# Altium PCB Mixer Placed.PCBDOC
Units mil, origin at the board's own origin, x right, y up, seen from the top; angles counter-clockwise.
Board outline 8000 x 4000 mil, 2 copper layers (Top Layer, Bottom Layer); 97 components, 56 nets, 281 pads, 0 vias.
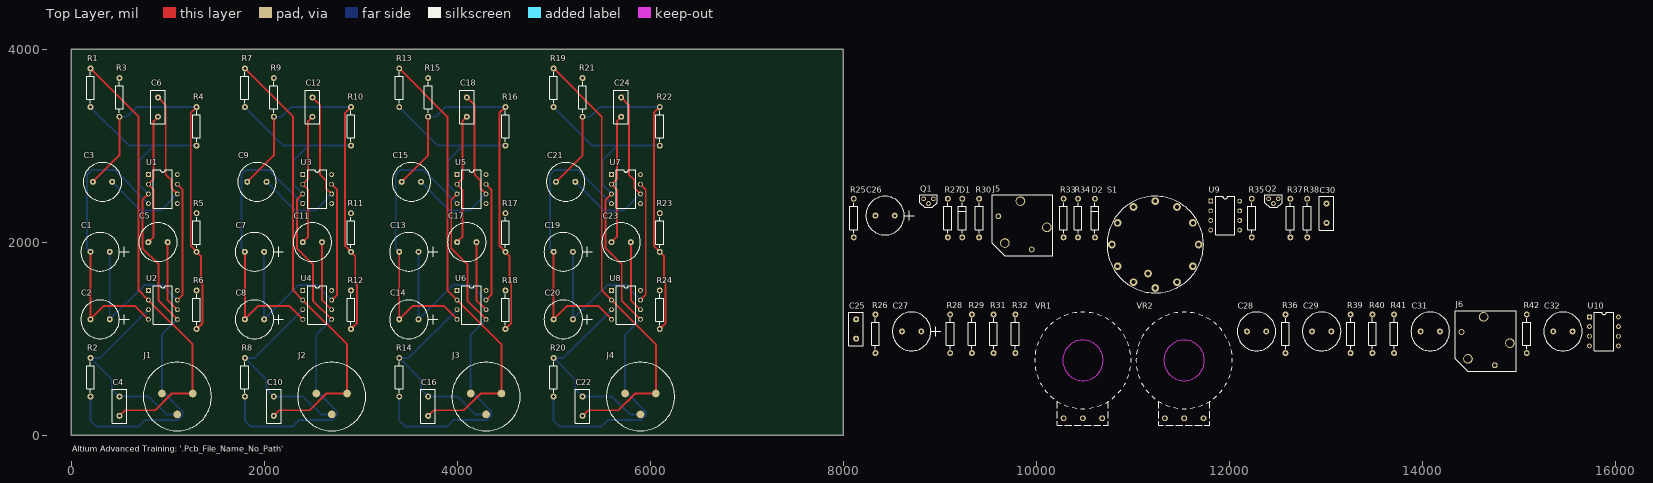
[diagram p0: Top Layer view]
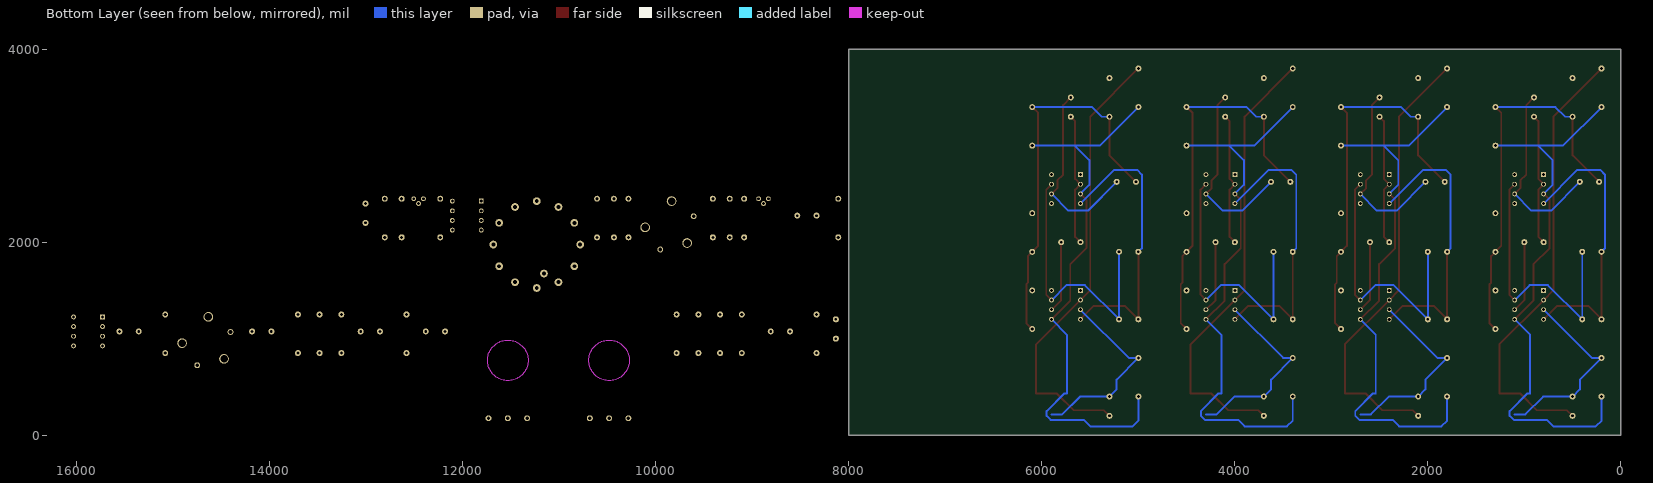
[diagram p1: Bottom Layer view, seen from below]

## Layer stack, top to bottom
Top Solder: solder mask 0.4, Solder Resist, Dk 3.5
Top Layer: signal copper 1.4
Dielectric 1: dielectric 12.6, FR-4, Dk 4.8
Bottom Layer: signal copper 1.4
Bottom Solder: solder mask 0.4, Solder Resist, Dk 3.5

## Board outline
0,0 8000,0 8000,3000 8000,4000 0,4000 0,0

## Design rules (kind name [scope] priority, off if disabled: settings)
Clearance [All] p1: gap=20 ignorepadtopadclearanceinfootprint=FALSE except(0: Arc-Hole Track-Hole SMDPad-Hole THPad-Hole Via-Hole Fill-Hole Poly-Hole Region-Hole Text-Hole)
PolygonConnect [All] p1: connectstyle=Relief reliefconductorwidth=10 reliefentries=4 polygonreliefangle="90 Angle" airgapwidth=10
RoomDefinition INP4 [InComponentClass('INP4')] p1: confinementstyle=ConfineIn formatcopy=TRUE lockcomponents=FALSE outline 0,0 1500,0 1500,4000 0,4000
RoomDefinition INP3 [InComponentClass('INP3')] p2: confinementstyle=ConfineIn formatcopy=TRUE lockcomponents=FALSE outline 1600,0 3100,0 3100,4000 1600,4000
RoomDefinition INP2 [InComponentClass('INP2')] p3: confinementstyle=ConfineIn formatcopy=TRUE lockcomponents=FALSE outline 3200,0 4700,0 4700,4000 3200,4000
RoomDefinition INP1 [InComponentClass('INP1')] p4: confinementstyle=ConfineIn formatcopy=TRUE lockcomponents=FALSE outline 4800,0 6300,0 6300,4000 4800,4000
RoomDefinition HP [InComponentClass('HP')] p5: confinementstyle=ConfineIn formatcopy=TRUE lockcomponents=FALSE outline 8060,1450 13110,1450 13110,2600 8060,2600
RoomDefinition AUX [InComponentClass('AUX')] p6: confinementstyle=ConfineIn formatcopy=TRUE lockcomponents=FALSE outline 8035,75 16085,75 16085,1400 8035,1400
RoutingVias [All] p1: holewidth=28 width=50 viastyle="Through Hole" minholewidth=28 minwidth=50 maxholewidth=28 maxwidth=50
SilkToBoardRegionClearance [All] p1 off:
SilkToSilkClearance [All] p1 off: silktosilkclearance=50
SilkToSolderMaskClearance [IsPad] p1: minsilkscreentomaskgap=100 clearancetoexposedcopper=TRUE
SolderMaskExpansion [All] p1: expansion=4 istentingtop=FALSE
SupplyNets "Schematic Supply Nets_2" [InNet('GND')] p1: voltage=0.000
SupplyNets "Schematic Supply Nets_1" [InNet('+15V')] p2: voltage=0.000
SupplyNets "Schematic Supply Nets" [InNet('-15V')] p3: voltage=0.000
Width [All] p1: maxlimit=30 minlimit=10 preferedwidth=20
27 further rules are at their usual default settings.

## Classes and differential pairs
channel class "Input channel": INP1 INP2 INP3 INP4
component class INP4: C1 C2 C3 C4 C5 C6 J1 R1 R2 R3 R4 R5 R6 U1 U2
component class INP3: C7 C8 C9 C10 C11 C12 J2 R7 R8 R9 R10 R11 R12 U3 U4
component class INP2: C13 C14 C15 C16 C17 C18 J3 R13 R14 R15 R16 R17 R18 U5 U6
component class INP1: C19 C20 C21 C22 C23 C24 J4 R19 R20 R21 R22 R23 R24 U7 U8
net class MB[1..2]: MB1 MB2
net class HEADPHONE[1..4]: HEADPHONE1 HEADPHONE2 HEADPHONE3 HEADPHONE4
component class HP: C26 C30 D1 D2 J5 Q1 Q2 R25 R27 R30 R33 R34 R35 R37 R38 S1 U9
component class AUX: C25 C27 C28 C29 C31 C32 J6 R26 R28 R29 R31 R32 R36 R39 R40 R41 R42 U10 VR1 VR2

## Components (designator, comment, footprint, x,y, rotation, side; value= is the part's Value field where it differs from the comment)
C1 "10uF" RB.2/.4 400,1900 r0 top (schematic designator C7)
C2 "10uF" RB.2/.4 400,1200 r0 top (schematic designator C8)
C3 "2.2uF" RB.2/.4-NP 425,2625 r0 top (schematic designator C6)
C4 "270pF" RAD0.2 500,200 r90 top (schematic designator C5)
C5 "6.8uF" RB.2/.4-NP 1000,2000 r0 top (schematic designator C4)
C6 "10pF" RAD0.2 900,3300 r90 top (schematic designator C3)
C7 "10uF" RB.2/.4 2000,1900 r0 top
C8 "10uF" RB.2/.4 2000,1200 r0 top
C9 "2.2uF" RB.2/.4-NP 2025,2625 r0 top (schematic designator C6)
C10 "270pF" RAD0.2 2100,200 r90 top (schematic designator C5)
C11 "6.8uF" RB.2/.4-NP 2600,2000 r0 top (schematic designator C4)
C12 "10pF" RAD0.2 2500,3300 r90 top (schematic designator C3)
C13 "10uF" RB.2/.4 3600,1900 r0 top (schematic designator C7)
C14 "10uF" RB.2/.4 3600,1200 r0 top (schematic designator C8)
C15 "2.2uF" RB.2/.4-NP 3625,2625 r0 top (schematic designator C6)
C16 "270pF" RAD0.2 3700,200 r90 top (schematic designator C5)
C17 "6.8uF" RB.2/.4-NP 4200,2000 r0 top (schematic designator C4)
C18 "10pF" RAD0.2 4100,3300 r90 top (schematic designator C3)
C19 "10uF" RB.2/.4 5200,1900 r0 top (schematic designator C7)
C20 "10uF" RB.2/.4 5200,1200 r0 top (schematic designator C8)
C21 "2.2uF" RB.2/.4-NP 5225,2625 r0 top (schematic designator C6)
C22 "270pF" RAD0.2 5300,200 r90 top (schematic designator C5)
C23 "6.8uF" RB.2/.4-NP 5800,2000 r0 top (schematic designator C4)
C24 "10pF" RAD0.2 5700,3300 r90 top (schematic designator C3)
C25 "270pF" RAD0.2 8135,1000 r90 top (schematic designator C14)
C26 "10uF" RB.2/.4 8535,2275 r0 top (schematic designator C2)
C27 "10uF" RB.2/.4 8810,1075 r0 top (schematic designator C13)
C28 "2.2uF" RB.2/.4-NP 12385,1075 r0 top (schematic designator C12)
C29 "1uF" RB.2/.4-NP 13060,1075 r0 top (schematic designator C11)
C30 "22pF" RAD0.2 13010,2200 r90 top (schematic designator C1)
C31 "2.2uF" RB.2/.4-NP 14185,1075 r0 top (schematic designator C10)
C32 "1uF" RB.2/.4-NP 15560,1075 r0 top (schematic designator C9)
D1 "1N914" DIODE0.4 9235,2050 r90 top (schematic designator D2)
D2 "1N914" DIODE0.4 10610,2050 r90 top (schematic designator D1)
J1 "XLR" XLR-FEMALE 1100,400 r0 top (schematic designator J2)
J2 "XLR" XLR-FEMALE 2700,400 r0 top
J3 "XLR" XLR-FEMALE 4300,400 r0 top (schematic designator J2)
J4 "XLR" XLR-FEMALE 5900,400 r0 top (schematic designator J2)
J5 "Headphone" JACK-6.25MM 9860,2175 r0 top (schematic designator J1)
J6 "Auxilary In" JACK-6.25MM 14660,975 r0 top (schematic designator J3)
Q1 "BC328-25" TO-92A 8835,2450 r0 top (schematic designator Q2)
Q2 "BC338-25" TO-92A 12410,2450 r0 top (schematic designator Q1)
R1 "10k" AXIAL0.4 200,3400 r90 top (schematic designator R10)
R2 "10k" AXIAL0.4 200,400 r90 top (schematic designator R11)
R3 "15k" AXIAL0.4 500,3300 r90 top (schematic designator R9)
R4 "10k" AXIAL0.4 1300,3000 r90 top (schematic designator R14)
R5 "10k" AXIAL0.4 1300,1900 r90 top (schematic designator R13)
R6 "15k" AXIAL0.4 1300,1100 r90 top (schematic designator R12)
R7 "10k" AXIAL0.4 1800,3400 r90 top (schematic designator R10)
R8 "10k" AXIAL0.4 1800,400 r90 top (schematic designator R11)
R9 "15k" AXIAL0.4 2100,3300 r90 top
R10 "10k" AXIAL0.4 2900,3000 r90 top (schematic designator R14)
R11 "10k" AXIAL0.4 2900,1900 r90 top (schematic designator R13)
R12 "15k" AXIAL0.4 2900,1100 r90 top
R13 "10k" AXIAL0.4 3400,3400 r90 top (schematic designator R10)
R14 "10k" AXIAL0.4 3400,400 r90 top (schematic designator R11)
R15 "15k" AXIAL0.4 3700,3300 r90 top (schematic designator R9)
R16 "10k" AXIAL0.4 4500,3000 r90 top (schematic designator R14)
R17 "10k" AXIAL0.4 4500,1900 r90 top (schematic designator R13)
R18 "15k" AXIAL0.4 4500,1100 r90 top (schematic designator R12)
R19 "10k" AXIAL0.4 5000,3400 r90 top (schematic designator R10)
R20 "10k" AXIAL0.4 5000,400 r90 top (schematic designator R11)
R21 "15k" AXIAL0.4 5300,3300 r90 top (schematic designator R9)
R22 "10k" AXIAL0.4 6100,3000 r90 top (schematic designator R14)
R23 "10k" AXIAL0.4 6100,1900 r90 top (schematic designator R13)
R24 "15k" AXIAL0.4 6100,1100 r90 top (schematic designator R12)
R25 "10k" AXIAL0.4 8110,2050 r90 top (schematic designator R8)
R26 "2.2k" AXIAL0.4 8335,850 r90 top (schematic designator R24)
R27 "22k" AXIAL0.4 9085,2050 r90 top (schematic designator R7)
R28 "6.8k" AXIAL0.4 9110,850 r90 top (schematic designator R23)
R29 "15k" AXIAL0.4 9335,850 r90 top (schematic designator R21)
R30 "33R" AXIAL0.4 9410,2050 r90 top (schematic designator R6)
R31 "15k" AXIAL0.4 9560,850 r90 top (schematic designator R22)
R32 "22k" AXIAL0.4 9785,850 r90 top (schematic designator R20)
R33 "68R" AXIAL0.4 10285,2050 r90 top (schematic designator R5)
R34 "10k" AXIAL0.4 10435,2050 r90 top (schematic designator R4)
R35 "33R" AXIAL0.4 12235,2050 r90 top (schematic designator R3)
R36 "10R" AXIAL0.4 12585,850 r90 top (schematic designator R19)
R37 "10k" AXIAL0.4 12635,2050 r90 top (schematic designator R2)
R38 "68k" AXIAL0.4 12810,2050 r90 top (schematic designator R1)
R39 "22k" AXIAL0.4 13260,850 r90 top (schematic designator R18)
R40 "15k" AXIAL0.4 13485,850 r90 top (schematic designator R16)
R41 "15k" AXIAL0.4 13710,850 r90 top (schematic designator R17)
R42 "10R" AXIAL0.4 15085,850 r90 top (schematic designator R15)
S1 "SW-12WAY" SW-12WAY 11235,1975 r0 top
U1 "OP27C" DIP8 800,2700 r0 top (schematic designator U2)
U2 "SSM2017P (8)" DIP8 800,1500 r0 top (schematic designator U3)
U3 "OP27C" DIP8 2400,2700 r0 top (schematic designator U2)
U4 "SSM2017P (8)" DIP8 2400,1500 r0 top (schematic designator U3)
U5 "OP27C" DIP8 4000,2700 r0 top (schematic designator U2)
U6 "SSM2017P (8)" DIP8 4000,1500 r0 top (schematic designator U3)
U7 "OP27C" DIP8 5600,2700 r0 top (schematic designator U2)
U8 "SSM2017P (8)" DIP8 5600,1500 r0 top (schematic designator U3)
U9 "TL071" DIP8 11810,2425 r0 top (schematic designator U1)
U10 "LM833M" DIP8 15735,1225 r0 top (schematic designator U4)
VR1 "10k LIN" "POT - 24MM" 10485,775 r0 top (schematic designator VR2)
VR2 "10k LOG" "POT - 24MM" 11535,775 r0 top (schematic designator VR1)

## Footprints (in the part's own frame and the unit in brackets; to place one, negate y for a bottom-side part, rotate by r counter-clockwise, add the part's x,y. Pads: shape width x height; smd on the part's side, far side on the other; paste and mask are expansions set on the pad)
AXIAL0.4 [mil]
  round 62 hole 32: 1(0,0) 2(400,0)
  silkscreen extent 40,-40 360,40
DIODE0.4 [mil]
  round 62 hole 32: 1(0,0) 2(400,0)
  silkscreen extent 40,-40 360,40
DIP8 [mil]
  rect 50x50 hole 32: 1(0,0)
  round 50 hole 32: 2(0,-100) 3(0,-200) 4(0,-300) 5(300,-300) 6(300,-200) 7(300,-100) 8(300,0)
  silkscreen extent 50,-350 250,50
JACK-6.25MM [mil]
  round 60 hole 39: 0(-251,94) 0(94,-251)
  round 100 hole 78: 1(251,-22) 2(-22,251) 3(-184,-184)
  silkscreen extent -315,-315 315,315
"POT - 24MM" [mil]
  round 62 hole 35: 1(-200,-600) 2(0,-600) 3(200,-600)
  round 50 hole 236.22 unplated mask+4: MNT(0,0)
  Keep-Out Layer circle w10: c0,0 r210
  silkscreen extent -500,-670 500,500
RAD0.2 [mil]
  round 62 hole 28: 1(0,0) 2(200,0)
  silkscreen extent -75,-75 275,75
RB.2/.4 [mil]
  round 62 hole 28: 1(0,0) 2(-200,0)
  silkscreen extent -300,-200 200,200
RB.2/.4-NP [mil]
  round 62 hole 28: 1(0,0) 2(-200,0)
  silkscreen extent -300,-200 100,200
SW-12WAY [mil]
  round 80 hole 40: 1(225,389.71) 2(389.71,225) 3(450,0) 4(389.71,-225) 5(225,-389.71) 6(0,-450) 7(-225,-389.71) 8(-389.71,-225) 9(-450,0) 10(-389.71,225) 11(-225,389.71) 12(0,450) 13(-75,-300)
  silkscreen extent -500,-500 500,500
TO-92A [mil]
  round 50 hole 30: 1(0,0) 2(50,-50) 3(100,0)
  silkscreen extent -40,-90 140,40
XLR-FEMALE [mil]
  round 80 smd: 1(-159.45,31.5) 2(159.45,31.5) 3(0,-185.04)
  silkscreen extent -354,-354 354,354

## Part data
C1 C2 C7 C8 C13 C14 C19 C20 C26 C27: library part "CAPACITOR POL", "Bi-Polar Capacitor"
C3 C4 C5 C6 C9 C10 C11 C12 C15 C16 C17 C18 C21 C22 C23 C24 C25 C28 C29 C30 C31 C32: library part CAP, "Capacitor"
D1 D2: "Diode"
J1 J2 J3 J4: "XLR connector, PCB mounted"
J5 J6: library part "PHONEJACK MONO"
Q1: "PNP BJT"
Q2: "NPN BJT"
R1 R2 R3 R4 R5 R6 R7 R8 R9 R10 R11 R12 R13 R14 R15 R16 R17 R18 R19 R20 R21 R22 R23 R24 R25 R26 R27 R28 R29 R30 R31 R32 R33 R34 R35 R36 R37 R38 R39 R40 R41 R42: library part RES1, "Resistor"
U1 U3 U5 U7: "Low Noise, High Speed Precision Operational Amplifier"
U2 U4 U6 U8: "Self-Contained Audio Preamplifier"
U9: "Low-Noise  JFET-Input Operational Amplifiers"
U10: "Fast Settling Dual Operational Amplifier"
VR1 VR2: library part POT1, "Potentiometer"

## Nets (pads, with @x,y where several pads share a name; then routed paths per layer and width w, separated by ;. In a path a pad name is that pad's centre, name@x,y a point inside that pad or via, vN(x,y) a via of type N, cw(c..) or ccw(c..) an arc to the next point about the centre after c; other vN are vias at no path point)
+15V: C1.1 C2.1 C7.1 C8.1 C13.1 C14.1 C19.1 C20.1 C26.1 C27.1 Q2.1 R37.2 U1.7 U2.7 U3.7 U4.7 U5.7 U6.7 U7.7 U8.7 U9.7 U10.4 | length 11427.2
  Top Layer w20: U2.7 1155,1455 1155,2545 U1.7 ; U4.7 2755,1455 2755,2545 U3.7 ; U6.7 4355,1455 4355,2545 U5.7 ; U8.7 5955,1455 5955,2545 U7.7
  Bottom Layer w20: C1.1 C2.1 755,1555 945,1555 U2.7 ; C7.1 C8.1 2355,1555 2545,1555 U4.7 ; C13.1 C14.1 3955,1555 4145,1555 U6.7 ; C19.1 C20.1 5555,1555 5745,1555 U8.7
-15V: C1.2 C2.2 C7.2 C8.2 C13.2 C14.2 C19.2 C20.2 C26.2 C27.2 Q1.1 R25.1 U1.4 U2.4 U3.4 U4.4 U5.4 U6.4 U7.4 U8.4 U9.4 U10.8 | length 12130.3
  Top Layer w20: C1.2 C2.2 340,1340 660,1340 U2.4 ; C7.2 C8.2 1940,1340 2260,1340 U4.4 ; C13.2 C14.2 3540,1340 3860,1340 U6.4 ; C19.2 C20.2 5140,1340 5460,1340 U8.4
  Bottom Layer w20: C1.2 164,1936 164,2700 214,2750 450,2750 U1.4 ; C7.2 1764,1936 1764,2700 1814,2750 2050,2750 U3.4 ; C13.2 3364,1936 3364,2700 3414,2750 3650,2750 U5.4 ; C19.2 4964,1936 4964,2700 5014,2750 5250,2750 U7.4
GND: J1.1 J2.1 J3.1 J4.1 J5.3 J6.3 R1.1 R2.1 R4.1 R7.1 R8.1 R10.1 R13.1 R14.1 R16.1 R19.1 R20.1 R22.1 R26.2 R27.1 R32.1 R39.1 U1.3 U2.5 U3.3 U4.5 U5.3 U6.5 U7.3 U8.5 VR1.2 VR2.3 | length 23140.7
  Top Layer w20: U1.3 739,2439 739,1939 906,1772 906,1394 U2.5 ; U3.3 2339,2439 2339,1939 2506,1772 2506,1394 U4.5 ; U5.3 3939,2439 3939,1939 4106,1772 4106,1394 U6.5 ; U7.3 5539,2439 5539,1939 5706,1772 5706,1394 U8.5
  Bottom Layer w20: R2.1 200,150 260,90 698,90 766,158 1110,158 1152,200 1152,250 970.5,431.5 940.55,431.5 940,432.05 940,1040 U2.5 ; R1.1 600,3000 857,3000 ; U1.3 707,2593 707,2850 857,3000 ; R4.1 857,3000 ; R8.1 1800,150 1860,90 2298,90 2366,158 2710,158 2752,200 2752,250 2570.5,431.5 2540.55,431.5 2540,432.05 2540,1040 U4.5 ; R7.1 2200,3000 2457,3000 ; U3.3 2307,2593 2307,2850 2457,3000 ; R10.1 2457,3000 ; R14.1 3400,150 3460,90 3898,90 3966,158 4310,158 4352,200 4352,250 4170.5,431.5 4140.55,431.5 4140,432.05 4140,1040 U6.5 ; R13.1 3800,3000 4057,3000 ; U5.3 3907,2593 3907,2850 4057,3000 ; R16.1 4057,3000 ; R20.1 5000,150 5060,90 5498,90 5566,158 5910,158 5952,200 5952,250 5770.5,431.5 5740.55,431.5 5740,432.05 5740,1040 U8.5 ; R19.1 5400,3000 5657,3000 ; U7.3 5507,2593 5507,2850 5657,3000 ; R22.1 5657,3000
HEADPHONE1: R23.2 S1.8
HEADPHONE2: R17.2 S1.7
HEADPHONE3: R11.2 S1.6
HEADPHONE4: R5.2 S1.5
MB1: R3.2 R9.2 R15.2 R21.2 R41.2 S1.11
MB2: R6.2 R12.2 R18.2 R24.2 R31.2 S1.12
NetC3_1: C3.1 C6.2 U1.6 | length 1952.1
  Top Layer w20: C6.2 980,3420 980,2700 1040,2640 1040,2560 U1.6
  Bottom Layer w20: C3.1 722,2328 928,2328 U1.6
NetC3_2: C3.2 R3.1 R4.2 R5.1 R6.1 | length 4031.4
  Top Layer w20: C3.2 500,2900 R3.1 ; R6.1 1361,1161 1361,1564 1344,1581 1344,1856 R5.1 1239,1961 1239,3339 R4.2
  Bottom Layer w20: R3.1 578,3300 678,3400 R4.2
NetC4_1: C4.1 J1.2 R1.2 U2.2 | length 4662.7
  Top Layer w20: R1.2 699,3301 699,1501 U2.2 1259.45,940.55 J1.2 1043.5,431.5 870,258 558,258 C4.1
NetC4_2: C4.2 J1.3 R2.2 U2.3 | length 2008
  Bottom Layer w20: U2.3 300,800 R2.2 425,575 425,475 C4.2 804.96,400 990,214.96 1100,214.96
NetC5_1: C5.1 U2.6 | length 741.4
  Top Layer w20: C5.1 1000,1400 U2.6
NetC5_2: C5.2 C6.1 U1.2 | length 1387
  Top Layer w20: C5.2 855,2055 855,2545 U1.2 855,2655 855,3255 C6.1
NetC9_1: C9.1 C12.2 U3.6 | length 1952.1
  Top Layer w20: C12.2 2580,3420 2580,2700 2640,2640 2640,2560 U3.6
  Bottom Layer w20: C9.1 2322,2328 2528,2328 U3.6
NetC9_2: C9.2 R9.1 R10.2 R11.1 R12.1 | length 4031.4
  Top Layer w20: C9.2 2100,2900 R9.1 ; R12.1 2961,1161 2961,1564 2944,1581 2944,1856 R11.1 2839,1961 2839,3339 R10.2
  Bottom Layer w20: R9.1 2178,3300 2278,3400 R10.2
NetC10_1: C10.1 J2.2 R7.2 U4.2 | length 4662.7
  Top Layer w20: R7.2 2299,3301 2299,1501 U4.2 2859.45,940.55 J2.2 2643.5,431.5 2470,258 2158,258 C10.1
NetC10_2: C10.2 J2.3 R8.2 U4.3 | length 2008
  Bottom Layer w20: U4.3 1900,800 R8.2 2025,575 2025,475 C10.2 2404.96,400 2590,214.96 2700,214.96
NetC11_1: C11.1 U4.6 | length 741.4
  Top Layer w20: C11.1 2600,1400 U4.6
NetC11_2: C11.2 C12.1 U3.2 | length 1387
  Top Layer w20: C11.2 2455,2055 2455,2545 U3.2 2455,2655 2455,3255 C12.1
NetC15_1: C15.1 C18.2 U5.6 | length 1952.1
  Top Layer w20: C18.2 4180,3420 4180,2700 4240,2640 4240,2560 U5.6
  Bottom Layer w20: C15.1 3922,2328 4128,2328 U5.6
NetC15_2: C15.2 R15.1 R16.2 R17.1 R18.1 | length 4031.4
  Top Layer w20: C15.2 3700,2900 R15.1 ; R18.1 4561,1161 4561,1564 4544,1581 4544,1856 R17.1 4439,1961 4439,3339 R16.2
  Bottom Layer w20: R15.1 3778,3300 3878,3400 R16.2
NetC16_1: C16.1 J3.2 R13.2 U6.2 | length 4662.7
  Top Layer w20: R13.2 3899,3301 3899,1501 U6.2 4459.45,940.55 J3.2 4243.5,431.5 4070,258 3758,258 C16.1
NetC16_2: C16.2 J3.3 R14.2 U6.3 | length 2008
  Bottom Layer w20: U6.3 3500,800 R14.2 3625,575 3625,475 C16.2 4004.96,400 4190,214.96 4300,214.96
NetC17_1: C17.1 U6.6 | length 741.4
  Top Layer w20: C17.1 4200,1400 U6.6
NetC17_2: C17.2 C18.1 U5.2 | length 1387
  Top Layer w20: C17.2 4055,2055 4055,2545 U5.2 4055,2655 4055,3255 C18.1
NetC21_1: C21.1 C24.2 U7.6 | length 1952.1
  Top Layer w20: C24.2 5780,3420 5780,2700 5840,2640 5840,2560 U7.6
  Bottom Layer w20: C21.1 5522,2328 5728,2328 U7.6
NetC21_2: C21.2 R21.1 R22.2 R23.1 R24.1 | length 4031.4
  Top Layer w20: C21.2 5300,2900 R21.1 ; R24.1 6161,1161 6161,1564 6144,1581 6144,1856 R23.1 6039,1961 6039,3339 R22.2
  Bottom Layer w20: R21.1 5378,3300 5478,3400 R22.2
NetC22_1: C22.1 J4.2 R19.2 U8.2 | length 4662.7
  Top Layer w20: R19.2 5499,3301 5499,1501 U8.2 6059.45,940.55 J4.2 5843.5,431.5 5670,258 5358,258 C22.1
NetC22_2: C22.2 J4.3 R20.2 U8.3 | length 2008
  Bottom Layer w20: U8.3 5100,800 R20.2 5225,575 5225,475 C22.2 5604.96,400 5790,214.96 5900,214.96
NetC23_1: C23.1 U8.6 | length 741.4
  Top Layer w20: C23.1 5800,1400 U8.6
NetC23_2: C23.2 C24.1 U7.2 | length 1387
  Top Layer w20: C23.2 5655,2055 5655,2545 U7.2 5655,2655 5655,3255 C24.1
NetC25_1: C25.1 R26.1 R28.2 U10.6
NetC25_2: C25.2 C28.1 R28.1 U10.7
NetC28_2: C28.2 R29.1 R40.1
NetC29_1: C29.1 VR2.2
NetC29_2: C29.2 R32.2 R36.1
NetC30_1: C30.1 R34.2 R38.1 U9.2
NetC30_2: C30.2 R30.2 R33.1 R35.1 R38.2
NetC31_1: C31.1 U10.1 U10.2
NetC31_2: C31.2 VR2.1
NetC32_1: C32.1 J6.1
NetC32_2: C32.2 R39.2 R42.1
NetD1_1: D1.1 D2.2 U9.6
NetD1_2: D1.2 Q1.2 R25.2
NetD2_1: D2.1 Q2.2 R37.1
NetJ5_1: J5.1 R33.2
NetQ1_3: Q1.3 R30.1
NetQ2_3: Q2.3 R35.2
NetR27_2: R27.2 U9.3
NetR29_2: R29.2 R31.1 VR1.3
NetR34_1: R34.1 S1.13
NetR36_2: R36.2 U10.5
NetR40_2: R40.2 R41.1 VR1.1
NetR42_2: R42.2 U10.3
pads on no net: J5.0 J5.2 J6.0 J6.2 S1.1 S1.2 S1.3 S1.4 S1.9 S1.10 U1.1 U1.5 U1.8 U2.1 U2.8 U3.1 U3.5 U3.8 U4.1 U4.8 U5.1 U5.5 U5.8 U6.1 U6.8 U7.1 U7.5 U7.8 U8.1 U8.8 U9.1 U9.5 U9.8 VR1.MNT VR2.MNT

## Silkscreen, mask and mechanical layers (free items; w line width, h text height)
Top Overlay:
  text "Altium Advanced Training: '.Pcb_File_Name_No_Path'" at 10,-170.01 h60